# EAGLE board 2022-07-28 LVMi Pressure Sensor - 3216 (EAGLE 9.6.2)
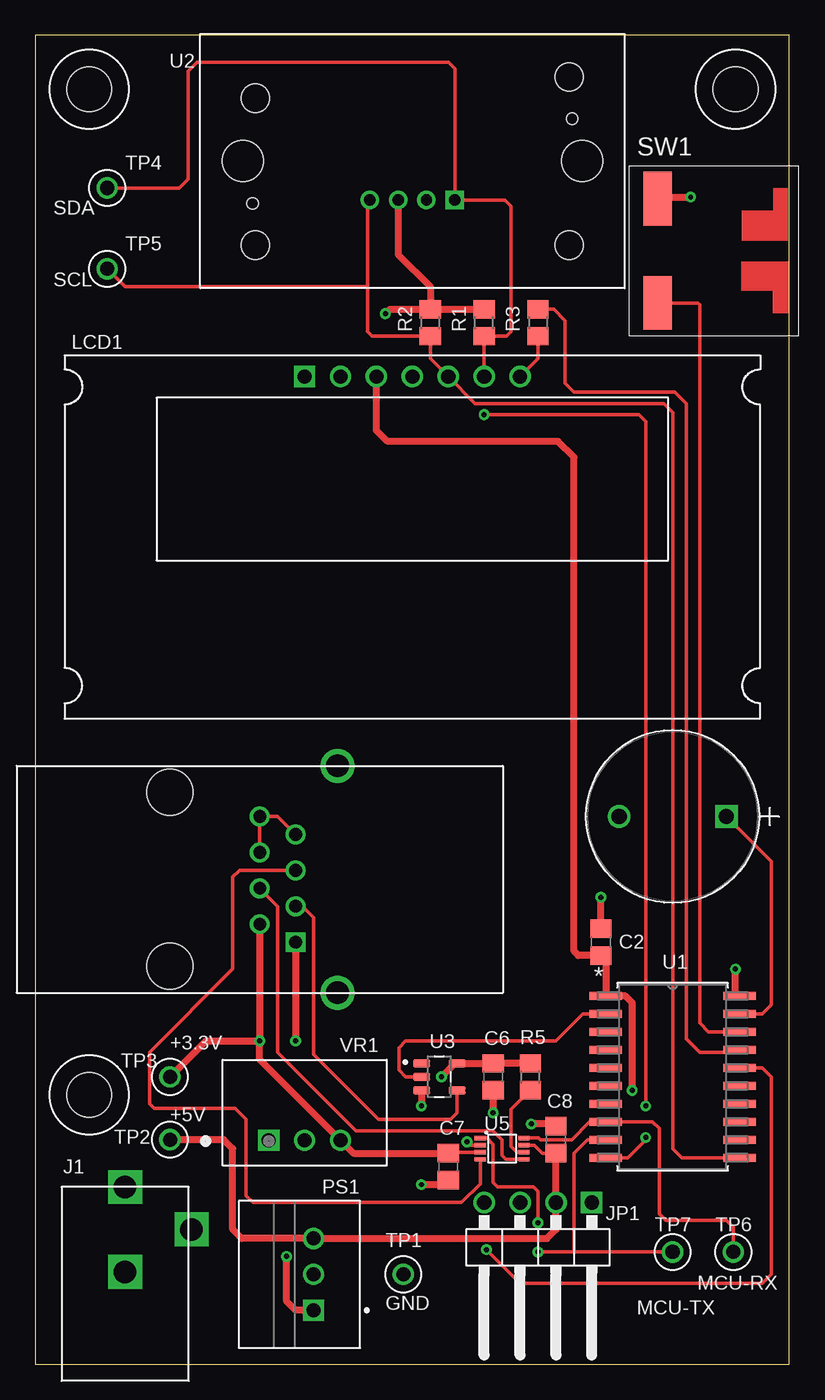
[diagram p0: board, top side]
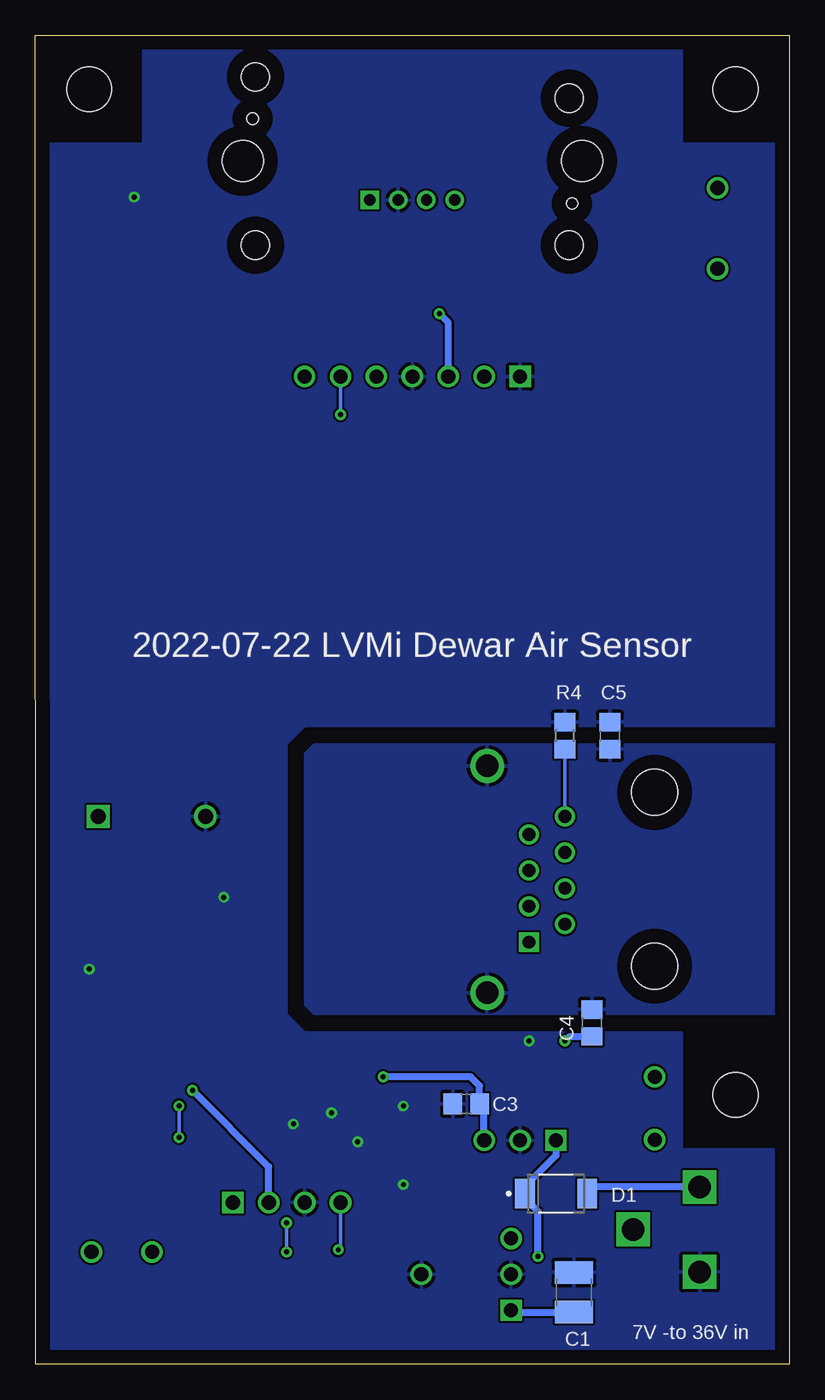
[diagram p1: board, bottom side, seen from below]

Size 53.34 x 93.98 mm. Coordinates in mm from the lower left corner, seen from the top.
Outline: 0,0 53.32,0 53.34,93.98 0,93.98 0,0
Copper layers (1*16): Top 0.035mm / dielectric 1.5mm / Bottom 0.035mm
Design rules "default": minimum track width 6mil, minimum drill 0.35mm, track to track 6mil, track to pad 6mil, pad to pad 6mil, via to via 6mil, smd to smd 6mil, copper to edge 40mil, drill to drill 6mil, minimum pad ring 10mil, minimum via ring 8mil, stop-mask expansion 4mil, vias tented up to drill 0mil, thermal gap 10mil
Holes 3.17 mm at 3.81,90.17 49.53,90.17 3.81,19.05

## Footprints (pad centres in the part's own frame; a part is rotated, then mirrored left to right if it is on the bottom)
C1210 = smd 1.6 x 2.7: 1 -1.4,0; 2 1.4,0
C0805 = smd 1.3 x 1.5: 1 -0.95,0; 2 0.95,0
DIO_PMEG6030EVPX = smd 1.4 x 2.1: 1 -2.2,0; 2 2.2,0
PJ-102AH = drill 1.6 square: GND 0,3; GNDBRK -4.7,0; PWR 0,-3
XPORT-2 = drill 0.9: 3.3V 0,-3.175; /RST 2.54,-1.905; CP1 0,1.905; CP2 2.54,3.175; CP3 0,4.445; RX 2.54,0.635; TX 0,-0.635 | drill 0.9 square: GND 2.54,-4.445 | drill 1.6: P$1 5.5,8.025; P$2 5.5,-8.025 | hole 3.25: -6.35,6.15; -6.35,-6.15
1X04/90 = drill 1.016 square: 1 -3.81,-3.81 | drill 1.016: 2 -1.27,-3.81; 3 1.27,-3.81; 4 3.81,-3.81
LCD-NEWHAVEN-16X2 = drill 1 square: 1 -7.62,0 | drill 1: 2 -5.08,0; 3 -2.54,0; 4 0,0; 5 2.54,0; 6 5.08,0; 7 7.62,0
PK-11N40PQ_MAL = drill 1.067 pad 1.575 square: 1 0,0 | drill 1.067 pad 1.575: 2 7.595,0
CONV_OKI-78SR-5/1.5-W36-C = drill 1 pad 1.5 square: 1 -2.54,0 | drill 1 pad 1.5: 2 0,0; 3 2.54,0
R0805 = smd 1.3 x 1.5: 1 -0.95,0; 2 0.95,0
SWITCH-RA-800BWSP9SM6RE = smd 2.03 x 3.81: 1 2.97,-3.685; 3 2.97,3.685
TP5000-TESTPOINT-BLK = drill 1: P$1 0,0
TP5000-TESTPOINT-RED = drill 1: P$1 0,0
TP5000-TESTPOINT-PUR = drill 1: P$1 0,0
TP5000-TESTPOINT-YEL = drill 1: P$1 0,0
TP5000-TESTPOINT-WHI = drill 1: P$1 0,0
SOIC20_12P8X7P5_MCH-M = smd 2.286 x 0.559: 1 -4.737,5.715; 2 -4.737,4.445; 3 -4.737,3.175; 4 -4.737,1.905; 5 -4.737,0.635; 6 -4.737,-0.635; 7 -4.737,-1.905; 8 -4.737,-3.175; 9 -4.737,-4.445; 10 -4.737,-5.715; 11 4.737,-5.715; 12 4.737,-4.445; 13 4.737,-3.175; 14 4.737,-1.905; 15 4.737,-0.635; 16 4.737,0.635; 17 4.737,1.905; 18 4.737,3.175; 19 4.737,4.445; 20 4.737,5.715
SDP800_PRESSURE_SENSOR = drill 0.8: GND 1,-2.75; SCL -3,-2.75; VDD -1,-2.75 | drill 0.8 square: SDA 3,-2.75 | hole 2.9: -12,0; 12,0 | hole 2: 11.1,5.95; -11.1,4.45; -11.1,-5.95; 11.1,-5.95 | hole 0.8: -11.3,-3; 11.3,3
SOT95P280X145-5N = smd 1.21 x 0.59: 1 -1.255,0.95; 2 -1.255,0; 3 -1.255,-0.95; 4 1.255,-0.95; 5 1.255,0.95
GHI-IC_VSSOP8(TI) = smd 0.8 x 0.3: 1 -1.55,0.75; 2 -1.55,0.25; 3 -1.55,-0.25; 4 -1.55,-0.75; 5 1.55,-0.75; 6 1.55,-0.25; 7 1.55,0.25; 8 1.55,0.75
CONV_P7805-Q24-S3-S = drill 1: GND 0,-1.95; VOUT 2.54,-1.95 | drill 1 square: VIN -2.54,-1.95

## Placement (x,y rotation side)
C1  10uF 50V  [C1210]  15.24,5.08 90 bottom
C2  0.1uF  [C0805]  40.01,29.84 90 top
C3  10uF 6V3  [C0805]  22.86,18.41 180 bottom
C4  0.01uF 200V  [C0805]  13.97,24.13 90 bottom
C5  0.01uF 200V  [C0805]  12.7,44.45 270 bottom
C6  0.1uF  [C0805]  32.38,20.32 90 top
C7  0.1uF  [C0805]  29.21,13.97 90 top
C8  0.1uF  [C0805]  36.83,15.88 270 top
D1  SCHOTTKY-PMEG6030EVPX  [DIO_PMEG6030EVPX]  16.51,12.06 0 bottom
J1  POWER_JACKPJ-102AH  [PJ-102AH]  6.35,9.53 180 top
J2  [XPORT-2]  15.88,34.29 0 top
JP1  UPDI  [1X04/90]  35.56,7.62 180 top
LCD1  Newhaven NHD-0216AW-1B3  [LCD-NEWHAVEN-16X2]  26.67,69.85 0 top
LS1  BEEPER-PK-11N40PQ  [PK-11N40PQ_MAL]  48.9,38.73 180 top
PS1  OKI-78SR-5/1.5-W36-C  [CONV_OKI-78SR-5/1.5-W36-C]  19.68,6.35 90 top
R1  4K7  [R0805]  31.75,73.66 90 top
R2  4K7  [R0805]  27.94,73.66 90 top
R3  [R0805]  35.56,73.66 270 top
R4  10K  [R0805]  15.88,44.45 90 bottom
R5  10K  [R0805]  35.02,20.32 90 top
SW1  SWITCH-RA-800BWSP9SM6RE  [SWITCH-RA-800BWSP9SM6RE]  46.99,78.74 180 top
TP1  GND  [TP5000-TESTPOINT-BLK]  26.04,6.35 0 top
TP2  +5V  [TP5000-TESTPOINT-RED]  9.53,15.88 0 top
TP3  +3.3V  [TP5000-TESTPOINT-PUR]  9.53,20.32 0 top
TP4  SDA  [TP5000-TESTPOINT-YEL]  5.08,83.19 0 top
TP5  SCL  [TP5000-TESTPOINT-WHI]  5.08,77.47 0 top
TP6  MCU-RX  [TP5000-TESTPOINT-WHI]  49.37,7.94 0 top
TP7  MCU-TX  [TP5000-TESTPOINT-WHI]  45.09,7.94 0 top
U1  ATTINY3216-SFSOIC20_12P8X7P5_MCH-M  [SOIC20_12P8X7P5_MCH-M]  45.09,20.32 0 top
U2  Sensiron SDP800  [SDP800_PRESSURE_SENSOR]  26.67,85.09 0 top
U3  SN74LV1T34DBVR  [SOT95P280X145-5N]  28.57,20.32 0 top
U5  TXB0102DCURVSSOP8  [GHI-IC_VSSOP8(TI)]  33.02,15.24 0 top
VR1  CUI P7805-Q24-S3-S  [CONV_P7805-Q24-S3-S]  19.05,17.78 0 top

## Library data of the parts
C1-C8 = AUmlib; SPICEPREFIX: C
D1 = AUmlib; DESCRIPTION: Diode Schottky 60V 3A Surface Mount SOD-128/CFP5; DIGI-KEY_PART_NUMBER: 1727-1349-1-ND; MF: Nexperia USA; MP: PMEG6030EVPX; PACKAGE: CFP5-2 Nexperia USA Inc.; PURCHASE-URL: https://pricing.snapeda.com/search/part/PMEG6030EVPX/?ref=eda
J1 J2 JP1 LCD1 SW1 TP1-TP7 U2 U5 = AUmlib
LS1 = AUmlib; COPYRIGHT: Copyright (C) 2022 Ultra Librarian. All rights reserved.; DIGI-KEY_PART_NUMBER_1: 458-1342-ND; MANUFACTURER_PART_NUMBER: PK-11N40PQ; MFR_NAME: Mallory Sonalert
PS1 = AUmlib; DESCRIPTION: Linear Regulator Replacement DC DC Converter 1 Output 5V 1.5A 7V - 36V Input; DIGI-KEY_PART_NUMBER: 811-2196-5-ND; MF: Murata Power Solutions Inc.; MP: OKI-78SR-5/1.5-W36-C; PACKAGE: SIP-3 Murata Power; PURCHASE-URL: https://pricing.snapeda.com/search/part/OKI-78SR-5/1.5-W36-C/?ref=eda
R1-R5 = AUmlib; SPICEPREFIX: R
U1 = AUmlib; COPYRIGHT: Copyright (C) 2022 Ultra Librarian. All rights reserved.; DIGI-KEY_PART_NUMBER_1: ATTINY3216-SF-ND; MANUFACTURER_PART_NUMBER: ATTINY3216-SF; MFR_NAME: Microchip
U3 = AUmlib; DESCRIPTION: Single Power Supply BUFFER Logic Level Shifter (no enable) 5-SOT-23 -40 to 125; DIGI-KEY_PART_NUMBER: 296-37176-1-ND; MF: Texas Instruments; MP: SN74LV1T34DBVR; PACKAGE: SOT-23-5 Texas Instruments; PURCHASE-URL: https://pricing.snapeda.com/search/part/SN74LV1T34DBVR/?ref=eda
VR1 = AUmlib; AVAILABILITY: Good; DESCRIPTION: 3.3V 2W; MF: CUI; MP: P7805-Q12-S1R5-S; PACKAGE: SIP-3 CUI; PRICE: $4.94

## Nets
+3.3V: C3.1 C4.1 C6.2 C7.2 J2.3.3V R5.2 TP3.P$1 U3.5 U5.3 VR1.VOUT
+5V: C2.1 C8.2 JP1.2 LCD1.3 PS1.3 R1.2 R2.2 TP2.P$1 U1.1 U2.VDD U5.7
/RES: LCD1.7 R3.2
/RST: J2./RST U3.4
BEEP: LS1.1 U1.19
GND: C1.2 C2.2 C3.2 C5.1 C6.1 C7.1 C8.1 J1.GND J2.GND JP1.3 LCD1.1 LCD1.4 LS1.2 PS1.2 R4.2 SW1.1 TP1.P$1 U1.20 U2.GND U3.3 U5.2 VR1.GND
GND-1: C4.2 C5.2 J2.P$1 J2.P$2
MCU-RX: TP6.P$1 U1.8 U5.8
MCU-TX: TP7.P$1 U1.9 U5.1
OE: R5.1 U5.6
OLED/RES: R3.1 U1.17
SCL: LCD1.5 R2.1 TP5.P$1 U1.11 U2.SCL
SDA: LCD1.6 R1.1 TP4.P$1 U1.10 U2.SDA
SWITCH: SW1.3 U1.18
UPDI: JP1.4 U1.16
VIN: C1.1 D1.1 PS1.1 VR1.VIN
VSUP: D1.2 J1.PWR
XP-CP: J2.CP1 J2.CP2 J2.CP3 R4.1
XP-RX: J2.RX U5.4
XP-TX: J2.TX U5.5
XPORT/RST: U1.2 U3.2

## Tracks (layer width: path | path; a pad name or v marks a point on that pad's centre or on a via)
+3.3V  (via drill 0.35)
  Top 0.254: C7.2 29.28,14.99 U5.3
  Top 0.508: TP3.P$1 12.06,22.86 v15.88,22.86 | J2.3.3V v15.88,22.86 | v15.88,22.86 15.88,21.55 VR1.VOUT 22.5,14.92 C7.2 | R5.2 C6.2 U3.5 29.68,21.27 v28.73,20.32
  Bottom 0.508: v15.88,22.86 15.55,23.18 C4.1 | VR1.VOUT 21.59,18.09 C3.1 21.91,19.69 22.54,20.32 v28.73,20.32
+5V  (via drill 0.35)
  Top 0.254: C8.2 35.88,14.93 35.31,15.49 U5.7 | U5.7
  Top 0.508: TP2.P$1 13.34,15.88 13.97,15.24 13.97,9.53 14.61,8.89 PS1.3 36.2,8.89 36.83,9.53 JP1.2 C8.2 | v24.77,74.3 25.08,74.61 R2.2 | U2.VDD 25.67,78.47 27.94,76.2 R2.2 | R2.2 R1.2 | LCD1.3 24.13,66.04 24.91,65.25 36.98,65.25 38.1,64.14 38.1,29.21 38.41,28.89 C2.1 40.35,28.55 U1.1 41.75,26.04 42.23,25.56 v42.23,19.37
  Bottom 0.508: LCD1.3 24.13,73.66 v24.77,74.3 | JP1.2 36.83,13.97 v42.23,19.37
/RES
  Top 0.254: R3.2 35.56,71.12 LCD1.7
/RST
  Top 0.254: U3.4 29.84,19.36 29.84,17.78 29.37,17.3 24.29,17.3 19.68,21.91 19.68,31.59 18.89,32.38 J2./RST
BEEP
  Top 0.254: U1.19 51.44,24.77 52.07,25.4 52.07,35.56 LS1.1
GND  (via drill 0.35)
  Top 0.254: U5.2 30.86,15.49 30.64,15.72 v30.54,15.72
  Top 0.508: J2.GND v18.41,22.86 | SW1.1 44.15,82.55 v46.35,82.55 | C6.1 v32.38,17.78 | C8.1 36.67,16.99 v35.08,16.99 | U1.20 49.53,26.33 v49.53,27.94 | C2.2 v40.01,33.02 | C7.1 28.89,12.7 v27.3,12.7 | U3.3 27.32,18.27 v27.3,18.26
  pour Bottom: 0,0 53.34,0 53.34,86.36 45.72,86.36 45.72,93.98 7.62,93.98 7.62,86.36 0,86.36 0,45.09 34.29,45.09 35.56,43.81 35.56,24.77 34.29,23.5 7.62,23.5 7.62,15.24 0,15.24
GND-1
  pour Bottom: 0,43.81 33.66,43.81 34.29,43.18 34.29,25.4 33.66,24.77 0,24.77
MCU-RX
  Top 0.254: TP6.P$1 49.37,9.68 48.9,10.16 44.61,10.16 44.13,10.64 44.13,16.67 43.66,17.14 U1.8 39.21,17.14 37.94,15.88 35.72,15.88 35.6,15.99 U5.8
MCU-TX  (via drill 0.35)
  Top 0.254: TP7.P$1 38.1,7.94 | 38.1,7.94 v35.56,7.94 | U1.9 39.05,15.88 38.1,14.92 38.1,7.94 | v35.56,10 35.56,12.22 35.24,12.54 32.7,12.54 32.38,12.86 32.38,15.56 31.95,15.99 U5.1
  Bottom 0.254: v35.56,7.94 v35.56,10
OE
  Top 0.254: R5.1 33.66,18 33.66,15.4 34.06,14.99 U5.6
OLED/RES
  Top 0.254: U1.17 49.66,22.07 46.99,22.07 46.04,23.02 46.04,67.94 45.24,68.74 38.1,68.74 37.47,69.37 37.47,73.82 36.67,74.61 R3.1
SCL
  Top 0.254: 23.5,76.2 23.5,73.03 23.81,72.71 R2.1 27.94,71.12 LCD1.5 31.11,67.94 44.45,67.94 45.09,67.31 45.09,15.24 45.72,14.61 U1.11 | 23.5,76.2 23.5,82.17 U2.SCL | TP5.P$1 6.35,76.2 23.5,76.2
SDA  (via drill 0.35)
  Top 0.254: TP4.P$1 10.16,83.19 10.79,83.82 10.79,91.44 11.43,92.08 29.21,92.08 29.67,91.61 U2.SDA 33.23,82.34 33.66,81.92 33.66,73.03 33.34,72.71 R1.1 LCD1.6 | U1.10 41.91,14.61 43.18,15.88 v43.18,16.03 | v43.18,18.26 43.18,66.67 42.7,67.15 v31.75,67.15
  Bottom 0.254: v43.18,18.26 v43.18,16.03 | v31.75,67.15 LCD1.6
SWITCH
  Top 0.254: U1.18 47.62,23.5 46.99,24.13 46.99,74.93 46.87,75.06 SW1.3
UPDI  (via drill 0.35)
  Top 0.254: v31.91,8.1 34.29,5.71 51.44,5.71 52.07,6.35 52.07,20.32 51.44,20.95 U1.16
  Bottom 0.254: JP1.4 31.75,8.26 v31.91,8.1
VIN  (via drill 0.35)
  Top 0.508: PS1.1 18.41,3.81 17.78,4.45 v17.78,7.62
  Bottom 0.508: PS1.1 19.55,3.68 C1.1 | VR1.VIN 16.51,14.76 18.71,12.56 D1.1 18.71,11.72 17.78,10.79 v17.78,7.62
VSUP
  Bottom 0.508: J1.PWR 13.79,12.53 13.97,12.7 14.31,12.36 D1.2
XP-CP
  Top 0.254: J2.CP1 J2.CP3 17.14,38.73 J2.CP2
  Bottom 0.254: J2.CP3 R4.1
XP-RX
  Top 0.254: J2.RX 14.45,34.92 13.97,34.45 13.97,27.94 8.1,22.07 8.1,18.41 8.41,18.1 14.13,18.1 14.92,17.3 14.92,11.91 15.4,11.43 30.16,11.43 31.5,12.76 31.5,14.46 U5.4
XP-TX
  Top 0.254: J2.TX 17.14,32.38 17.14,22.07 22.7,16.51 32.38,16.51 33.02,15.88 33.02,14.76 33.29,14.49 U5.5
XPORT/RST
  Top 0.254: U1.2 38.73,24.77 36.83,22.86 26.19,22.86 25.72,22.38 25.72,20.8 26.19,20.32 U3.2

## Text on the board
bPlace: 2022-07-22 LVMi Dewar Air Sensor | 7V -to 36V in